# EAGLE board CT_schematic (EAGLE 7.6.0)

Size 100 x 80 mm. Coordinates in mm from the lower left corner, seen from the top.
Outline: 0,0 100,0 100,80 0,80 0,0
Copper layers (1*16): Top 0.035mm / dielectric 1.5mm / Bottom 0.035mm
Design rules "default": minimum track width 10mil, minimum drill 24mil, track to track 8mil, track to pad 8mil, pad to pad 8mil, via to via 8mil, smd to smd 8mil, copper to edge 40mil, drill to drill 8mil, minimum pad ring 10mil, minimum via ring 8mil, stop-mask expansion 4mil, vias tented up to drill 0mil, thermal gap 10mil

## Footprints (pad centres in the part's own frame; a part is rotated, then mirrored left to right if it is on the bottom)
C0603 = smd 0.8 x 0.8: 1 -0.762,0; 2 0.762,0
C0402 = smd 0.5 x 0.5: 1 -0.508,0; 2 0.508,0
C0805 = smd 1.2 x 1.3: 1 -1.016,0; 2 1.016,0
C1210 = smd 1.2 x 2.5: 1 -1.524,0; 2 1.524,0
EXV-9H = smd 3.505 x 1.676: 1 -2.857,0; 2 2.857,0
L0603 = smd 0.8 x 0.8: 1 -0.762,0; 2 0.762,0
PJ-037B_PACKAGE = drill 3.7 square: 1 12,0 | drill 3.2 square: 2 6,0
R0603 = smd 0.8 x 0.8: 1 -0.762,0; 2 0.762,0
LQFP64 = smd 0.3 x 1.2: 1 -3.75,-5.75; 2 -3.25,-5.75; 3 -2.75,-5.75; 4 -2.25,-5.75; 5 -1.75,-5.75; 6 -1.25,-5.75; 7 -0.75,-5.75; 8 -0.25,-5.75; 9 0.25,-5.75; 10 0.75,-5.75; 11 1.25,-5.75; 12 1.75,-5.75; 13 2.25,-5.75; 14 2.75,-5.75; 15 3.25,-5.75; 16 3.75,-5.75; 33 3.75,5.75; 34 3.25,5.75; 35 2.75,5.75; 36 2.25,5.75; 37 1.75,5.75; 38 1.25,5.75; 39 0.75,5.75; 40 0.25,5.75; 41 -0.25,5.75; 42 -0.75,5.75; 43 -1.25,5.75; 44 -1.75,5.75; 45 -2.25,5.75; 46 -2.75,5.75; 47 -3.25,5.75; 48 -3.75,5.75 | smd 1.2 x 0.3: 17 5.75,-3.75; 18 5.75,-3.25; 19 5.75,-2.75; 20 5.75,-2.25; 21 5.75,-1.75; 22 5.75,-1.25; 23 5.75,-0.75; 24 5.75,-0.25; 25 5.75,0.25; 26 5.75,0.75; 27 5.75,1.25; 28 5.75,1.75; 29 5.75,2.25; 30 5.75,2.75; 31 5.75,3.25; 32 5.75,3.75; 49 -5.75,3.75; 50 -5.75,3.25; 51 -5.75,2.75; 52 -5.75,2.25; 53 -5.75,1.75; 54 -5.75,1.25; 55 -5.75,0.75; 56 -5.75,0.25; 57 -5.75,-0.25; 58 -5.75,-0.75; 59 -5.75,-1.25; 60 -5.75,-1.75; 61 -5.75,-2.25; 62 -5.75,-2.75; 63 -5.75,-3.25; 64 -5.75,-3.75
SOIC-8 = smd 1.6 x 0.6: 1 -2.7,1.905 | smd 1.55 x 0.6: 2 -2.7,0.635; 3 -2.7,-0.635; 4 -2.7,-1.905; 5 2.7,-1.905; 6 2.7,-0.635; 7 2.7,0.635; 8 2.7,1.905
SSOP-28 = smd 1.5 x 0.4: 1 -3.625,4.225; 2 -3.625,3.575; 3 -3.625,2.925; 4 -3.625,2.275; 5 -3.625,1.625; 6 -3.625,0.975; 7 -3.625,0.325; 8 -3.625,-0.325; 9 -3.625,-0.975; 10 -3.625,-1.625; 11 -3.625,-2.275; 12 -3.625,-2.925; 13 -3.625,-3.575; 14 -3.625,-4.225; 15 3.625,-4.225; 16 3.625,-3.575; 17 3.625,-2.925; 18 3.625,-2.275; 19 3.625,-1.625; 20 3.625,-0.975; 21 3.625,-0.325; 22 3.625,0.325; 23 3.625,0.975; 24 3.625,1.625; 25 3.625,2.275; 26 3.625,2.925; 27 3.625,3.575; 28 3.625,4.225
FCI_10118193-0001LF = smd 0.4 x 1.35: 1 -1.3,2.675; 2 -0.65,2.675; 3 0,2.675; 4 0.65,2.675; 5 1.3,2.675 | smd 1.6 x 1.4: 6 -3.2,2.45; 7 3.2,2.45 | smd 1.9 x 1.9: 8 -1.2,0; 9 1.2,0 | hole 0.5: -3.3,0; 3.3,0
RFM75-S = smd 0.85 x 1.6: 1 1.7,0.8; 2 2.97,0.8; 3 4.24,0.8; 4 5.51,0.8; 5 6.78,0.8; 6 8.05,0.8; 7 9.32,0.8; 8 10.59,0.8
ABLS-25.000MHZ-B2F-T = smd 5.6 x 2.8: 1 -3.81,0; 2 5.69,0
ASEK = smd 1.4 x 1: 1 -1.1,-0.8; 2 1.1,-0.8; 3 1.1,0.8; 4 -1.1,0.8
ASFL1 = smd 1.7 x 1.5: 1 -1.27,-1.1; 2 1.27,-1.1; 3 1.27,1.1; 4 -1.27,1.1
WSON-8 = smd 0.3 x 0.6: 1 -0.75,0; 2 0.05,0; 3 0.85,0; 4 1.65,0; 5 1.65,3.8; 6 0.85,3.8; 7 0.05,3.8; 8 -0.75,3.8 | smd 3 x 2.6: PAD 0.45,1.9
SON-6 = smd 0.55 x 0.3: 1 -0.355,0.5 | smd 0.52 x 0.3: 2 -0.37,0; 3 -0.37,-0.5; 4 0.37,-0.5; 5 0.37,0; 6 0.37,0.5
SW_4-1437565-2 = smd 1.4 x 2.1: 1 -2.23,4.55; 2 -2.23,-4.55; 3 2.23,4.55; 4 2.23,-4.55
LGM67K-G1J2-24-Z = smd 0.8 x 1.4: A -2,0; C 0,0
NC7SZ125M5X = smd 1.3 x 0.7: 1 -1.3,0.95; 2 -1.3,0; 3 -1.3,-0.95; 4 1.3,-0.95; 5 1.3,0.95

## Placement (x,y rotation side)
C1  1e-06  [C0603]  -27.94,69.85 0 top  (outside the outline)
C2  1e-07  [C0603]  -31.75,69.85 0 top  (outside the outline)
C3  1e-07  [C0603]  -35.56,69.85 0 top  (outside the outline)
C4  1e-07  [C0603]  -39.37,69.85 0 top  (outside the outline)
C5  1e-07  [C0603]  -43.18,69.85 0 top  (outside the outline)
C6  4.7e-06  [C0603]  -24.13,69.85 0 top  (outside the outline)
C7  1e-07  [C0603]  -46.99,69.85 0 top  (outside the outline)
C8  1e-07  [C0603]  -50.8,69.85 0 top  (outside the outline)
C9  1e-08  [C0603]  -54.61,69.85 0 top  (outside the outline)
C10  1e-06  [C0603]  -58.42,69.85 0 top  (outside the outline)
C11  1e-11  [C0402]  -38.1,74.93 0 top  (outside the outline)
C12  1e-11  [C0402]  -41.91,74.93 0 top  (outside the outline)
C13  1e-08  [C0402]  -45.72,74.93 0 top  (outside the outline)
C14  1e-07  [C0402]  -49.53,74.93 0 top  (outside the outline)
C15  4.7e-06  [C0805]  -67.31,57.15 0 top  (outside the outline)
C16  1e-07  [C0402]  -53.34,74.93 0 top  (outside the outline)
C17  1e-07  [C0402]  -57.15,74.93 0 top  (outside the outline)
C18  1e-07  [C0402]  -60.96,74.93 0 top  (outside the outline)
C19  1e-06  [C0603]  -62.23,69.85 0 top  (outside the outline)
C20  1e-08  [C0402]  -64.77,74.93 0 top  (outside the outline)
C21  1e-08  [C0402]  -68.58,74.93 0 top  (outside the outline)
C22  1e-08  [C0402]  -15.24,80.01 0 top  (outside the outline)
C23  1e-05  [C1210]  -49.53,58.42 0 top  (outside the outline)
C24  1e-05  [C1210]  -55.88,58.42 0 top  (outside the outline)
C25  1e-07  [C0402]  -19.05,80.01 0 top  (outside the outline)
C26  0.0001  [EXV-9H]  -38.1,50.8 0 top  (outside the outline)
C27  0.0001  [EXV-9H]  -49.53,50.8 0 top  (outside the outline)
C28  1e-08  [C0402]  -22.86,80.01 0 top  (outside the outline)
F1  240.0  [L0603]  -66.04,69.85 0 top  (outside the outline)
J1  PJ-037B  [PJ-037B_PACKAGE]  -55.88,7.62 0 top  (outside the outline)
R2  1000.0  [R0603]  -15.24,74.93 0 top  (outside the outline)
R4  4700.0  [R0603]  -19.05,74.93 0 top  (outside the outline)
R5  10000.0  [R0603]  -30.48,64.77 0 top  (outside the outline)
R6  10000.0  [R0603]  -35.56,64.77 0 top  (outside the outline)
R7  10000.0  [R0603]  -40.64,64.77 0 top  (outside the outline)
R8  10000.0  [R0603]  -45.72,64.77 0 top  (outside the outline)
R9  4700.0  [R0603]  -22.86,74.93 0 top  (outside the outline)
R10  10000.0  [R0603]  -50.8,64.77 0 top  (outside the outline)
R11  10000.0  [R0603]  -55.88,64.77 0 top  (outside the outline)
R12  10000.0  [R0603]  -60.96,64.77 0 top  (outside the outline)
R13  10000.0  [R0603]  -66.04,64.77 0 top  (outside the outline)
R14  100000.0  [R0603]  -15.24,64.77 0 top  (outside the outline)
R15  2231.0  [R0603]  -26.67,74.93 0 top  (outside the outline)
R16  1000.0  [R0603]  -30.48,74.93 0 top  (outside the outline)
R17  10000.0  [R0603]  -15.24,69.85 0 top  (outside the outline)
R18  10000.0  [R0603]  -20.32,69.85 0 top  (outside the outline)
R19  9100.0  [R0603]  -34.29,74.93 0 top  (outside the outline)
R20  680000.0  [R0603]  -20.32,64.77 0 top  (outside the outline)
R21  120000.0  [R0603]  -25.4,64.77 0 top  (outside the outline)
U1  stm32f072r8t7  [LQFP64]  -22.86,30.48 0 top  (outside the outline)
U2  AT25020B-SSHL-T  [SOIC-8]  -60.96,27.94 0 top  (outside the outline)
U3  FT232RL-REEL  [SSOP-28]  -35.56,7.62 0 top  (outside the outline)
U4  10118193-0001LF  [FCI_10118193-0001LF]  -55.88,40.64 0 top  (outside the outline)
U5  RFM75-S  [RFM75-S]  -26.67,3.81 0 top  (outside the outline)
U6  ABLS-25.000MHZ-B2F-T  [ABLS-25.000MHZ-B2F-T]  -26.67,58.42 0 top  (outside the outline)
U7  ASEK-32.768KHz-ECST  [ASEK]  -29.21,50.8 0 top  (outside the outline)
U8  ASFL1-12MHZ-NCS  [ASFL1]  -46.99,41.91 0 top  (outside the outline)
U9  LP3878SDX-ADJ/NOPB  [WSON-8]  -30.48,40.64 0 top  (outside the outline)
U10  TPS3895ADRYR  [SON-6]  -25.4,78.74 0 top  (outside the outline)
U11  4-1437565-2  [SW_4-1437565-2]  -44.45,29.21 0 top  (outside the outline)
U12  Q65110A2395  [LGM67K-G1J2-24-Z]  -38.1,58.42 0 top  (outside the outline)
U13  nc7sz125m5x  [NC7SZ125M5X]  -60.96,57.15 0 top  (outside the outline)

## Library data of the parts
C1-C28 F1 J1 R2 R4-R21 U1-U13 = circuit_tree

## Nets
CLK_CRYSTAL_U1_5: C11.1 U1.5 U6.1
CLK_CRYSTAL_U1_6: C12.1 U1.6 U6.2
CLK_U1_3: U1.3 U7.3
CLK_U3_27: U3.27 U8.3
GND: C1.2 C2.2 C3.2 C4.2 C5.2 C6.2 C7.2 C8.2 C9.2 C10.2 C11.2 C12.2 C13.2 C14.2 C15.2 C16.2 C17.2 C18.2 C19.2 C20.2 C21.2 C22.2 C23.2 C24.2 C25.2 C26.2 C27.2 C28.2 J1.2 R2.2 R5.2 R11.2 R16.2 R19.2 R21.2 U1.12 U1.18 U1.31 U1.47 U1.63 U2.4 U3.7 U3.18 U3.21 U3.25 U3.26 U4.5 U4.6 U4.7 U4.8 U4.9 U5.1 U7.2 U8.2 U9.3 U9.PAD U10.2 U12.C U13.1 U13.3
NET_U1_7: R4.1 U1.7 U13.4
NET_U1_13: C9.1 C10.1 F1.1 U1.13
NET_U1_60: R5.1 U1.60
NET_U1_61: U12.A
NET_U1_62: U11.3 U11.4
NET_U2_3: R6.1 U2.3
NET_U2_7: R8.1 U2.7
NET_U3_14: R10.1 U3.14
NET_U3_17: C16.1 U3.17
NET_U3_19: R11.1 U3.19
NET_U4_1: R9.1 U4.1
NET_U4_2: U3.16 U4.2
NET_U4_3: U3.15 U4.3
NET_U4_19: R9.2
NET_U5_3: R12.1 U5.3
NET_U9_1: C22.1 U9.1
NET_U9_6: R15.2 R16.1 U9.6
NET_U9_8: R14.1 U9.8
NET_U10_1: R18.1 R19.1 U10.1
NET_U10_3: R20.2 R21.1 U10.3
NET_U10_4: R17.1 U10.4 U13.2
NET_U11_1: R2.1 U11.1 U11.2
PROC_SPI1_MISO: U1.22 U5.7
PROC_SPI1_MOSI: U1.23 U5.6
PROC_SPI1_NSS: R13.1 U1.20 U5.4
PROC_SPI1_SCK: U1.21 U5.5
PROC_SPI2_MISO: U1.10 U2.2
PROC_SPI2_MOSI: U1.11 U2.5
PROC_SPI2_NSS: R7.1 U1.33 U2.1
PROC_SPI2_SCK: U1.29 U2.6
PROC_USART1_CTS: U1.44 U3.3
PROC_USART1_RTS: U1.45 U3.11
PROC_USART1_RX: U1.43 U3.1
PROC_USART1_TX: U1.42 U3.5
VCC_S1_15V4: C23.1 C26.1 C27.1 J1.1 R14.2 U9.4
VCC_TIER1_3V3: C1.1 C2.1 C3.1 C4.1 C5.1 C6.1 C7.1 C8.1 C13.1 C14.1 C15.1 C17.1 C18.1 C19.1 C20.1 C21.1 C24.1 C25.1 C28.1 F1.2 R4.2 R6.2 R7.2 R8.2 R10.2 R12.2 R13.2 R15.1 R17.2 R18.2 R20.1 U1.1 U1.19 U1.32 U1.48 U1.64 U2.8 U3.4 U3.20 U5.2 U7.4 U8.4 U9.5 U10.6 U13.5

## Tracks (layer width: path | path; a pad name or v marks a point on that pad's centre or on a via)
CLK_CRYSTAL_U1_5  (2 unrouted)
CLK_CRYSTAL_U1_6  (2 unrouted)
CLK_U1_3  (1 unrouted)
CLK_U3_27  (1 unrouted)
GND  (59 unrouted)
NET_U1_7  (2 unrouted)
NET_U1_13  (3 unrouted)
NET_U1_60  (1 unrouted)
NET_U1_62  (1 unrouted)
NET_U2_3  (1 unrouted)
NET_U2_7  (1 unrouted)
NET_U3_14  (1 unrouted)
NET_U3_17  (1 unrouted)
NET_U3_19  (1 unrouted)
NET_U4_1  (1 unrouted)
NET_U4_2  (1 unrouted)
NET_U4_3  (1 unrouted)
NET_U5_3  (1 unrouted)
NET_U9_1  (1 unrouted)
NET_U9_6  (2 unrouted)
NET_U9_8  (1 unrouted)
NET_U10_1  (2 unrouted)
NET_U10_3  (2 unrouted)
NET_U10_4  (2 unrouted)
NET_U11_1  (2 unrouted)
PROC_SPI1_MISO  (1 unrouted)
PROC_SPI1_MOSI  (1 unrouted)
PROC_SPI1_NSS  (2 unrouted)
PROC_SPI1_SCK  (1 unrouted)
PROC_SPI2_MISO  (1 unrouted)
PROC_SPI2_MOSI  (1 unrouted)
PROC_SPI2_NSS  (2 unrouted)
PROC_SPI2_SCK  (1 unrouted)
PROC_USART1_CTS  (1 unrouted)
PROC_USART1_RTS  (1 unrouted)
PROC_USART1_RX  (1 unrouted)
PROC_USART1_TX  (1 unrouted)
VCC_S1_15V4  (5 unrouted)
VCC_TIER1_3V3  (44 unrouted)